# EAGLE board LED STRIP (EAGLE 6.0)
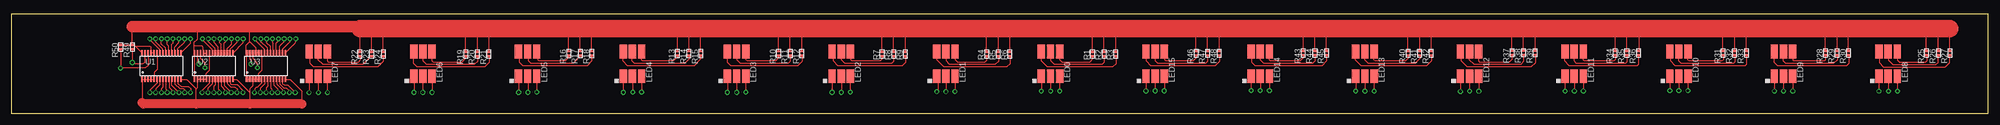
[diagram p0: board, top side]
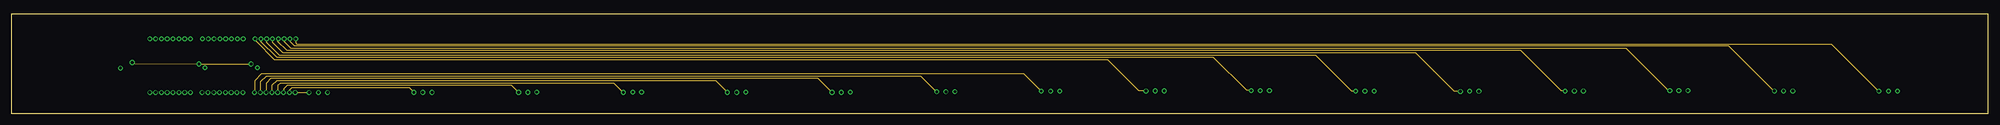
[diagram p1: board, inner layer Inner1]
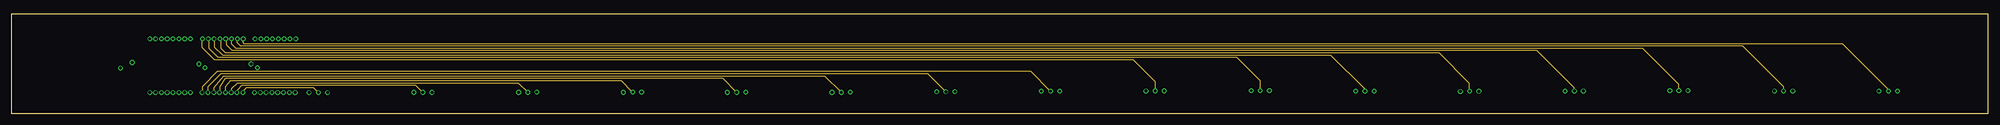
[diagram p2: board, inner layer Inner2]
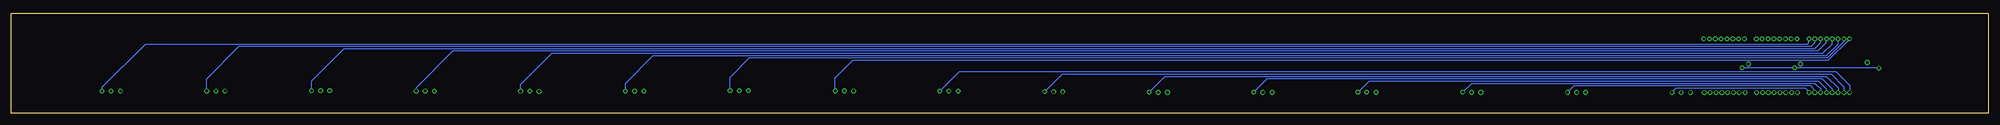
[diagram p3: board, bottom side, seen from below]

Size 431.8 x 21.84 mm. Coordinates in mm from the lower left corner, seen from the top.
Outline: 0,0 431.8,0 431.8,21.84 0,21.84 0,0
Copper layers (1*2+15*16): Top 0.035mm / dielectric 1.5mm / Inner1 0.035mm / dielectric 0.15mm / Inner2 0.035mm / dielectric 0.2mm / Bottom 0.035mm
Design rules: minimum track width 10mil, minimum drill 23mil, track to track 8mil, track to pad 8mil, pad to pad 8mil, via to via 8mil, smd to smd 8mil, copper to edge 40mil, drill to drill 8mil, minimum pad ring 10mil, minimum via ring 8mil, stop-mask expansion 4mil, vias tented up to drill 0mil, thermal gap 10mil

## Footprints (pad centres in the part's own frame; a part is rotated, then mirrored left to right if it is on the bottom)
6-PLCC = smd 3 x 1.6: 1 0,0; 2 0,-2; 3 0,-4; 4 5.4,-4; 5 5.4,-2; 6 5.4,0
0402 = smd 0.4 x 0.6: P$1 0,0; P$2 0.9,0
TSSOP28 = smd 0.35 x 1.2: 1 -4.225,-2.9; 2 -3.575,-2.9; 3 -2.925,-2.9; 4 -2.275,-2.9; 5 -1.625,-2.9; 6 -0.975,-2.9; 7 -0.325,-2.9; 8 0.325,-2.9; 9 0.975,-2.9; 10 1.625,-2.9; 11 2.275,-2.9; 12 2.925,-2.9; 13 3.575,-2.9; 14 4.225,-2.9; 15 4.225,2.9; 16 3.575,2.9; 17 2.925,2.9; 18 2.275,2.9; 19 1.625,2.9; 20 0.975,2.9; 21 0.325,2.9; 22 -0.325,2.9; 23 -0.975,2.9; 24 -1.625,2.9; 25 -2.275,2.9; 26 -2.925,2.9; 27 -3.575,2.9; 28 -4.225,2.9

## Placement (x,y rotation side)
LED0  LED_RGB  [6-PLCC]  224.98,8.13 90 top
LED1  LED_RGB  [6-PLCC]  202.12,8.13 90 top
LED2  LED_RGB  [6-PLCC]  179.26,8.13 90 top
LED3  LED_RGB  [6-PLCC]  156.4,8.13 90 top
LED4  LED_RGB  [6-PLCC]  133.66,8.13 90 top
LED5  LED_RGB  [6-PLCC]  110.74,8.13 90 top
LED6  LED_RGB  [6-PLCC]  87.88,8.13 90 top
LED7  LED_RGB  [6-PLCC]  65.02,8.13 90 top
LED8  LED_RGB  [6-PLCC]  407.98,8.13 90 top
LED9  LED_RGB  [6-PLCC]  385.12,8.13 90 top
LED10  LED_RGB  [6-PLCC]  362.26,8.13 90 top
LED11  LED_RGB  [6-PLCC]  339.4,8.13 90 top
LED12  LED_RGB  [6-PLCC]  316.54,8.13 90 top
LED13  LED_RGB  [6-PLCC]  293.68,8.13 90 top
LED14  LED_RGB  [6-PLCC]  270.82,8.13 90 top
LED15  LED_RGB  [6-PLCC]  247.84,8.13 90 top
R1  [0402]  236.16,13.46 270 top
R2  [0402]  238.7,13.46 270 top
R3  [0402]  241.24,13.46 270 top
R4  [0402]  213.05,13.46 270 top
R5  [0402]  215.59,13.46 270 top
R6  [0402]  218.13,13.46 270 top
R7  [0402]  190.19,13.46 270 top
R8  [0402]  192.73,13.46 270 top
R9  [0402]  195.27,13.46 270 top
R10  [0402]  167.58,13.59 270 top
R11  [0402]  170.12,13.59 270 top
R12  [0402]  172.66,13.59 270 top
R13  [0402]  145.48,13.59 270 top
R14  [0402]  148.02,13.59 270 top
R15  [0402]  150.56,13.59 270 top
R16  [0402]  121.73,13.59 270 top
R17  [0402]  124.27,13.59 270 top
R18  [0402]  126.81,13.59 270 top
R19  [0402]  99.25,13.46 270 top
R20  [0402]  101.79,13.46 270 top
R21  [0402]  104.33,13.46 270 top
R22  [0402]  76.16,13.44 270 top
R23  [0402]  78.7,13.44 270 top
R24  [0402]  81.24,13.44 270 top
R25  [0402]  418.4,13.67 270 top
R26  [0402]  420.94,13.67 270 top
R27  [0402]  423.48,13.67 270 top
R28  [0402]  396.27,13.67 270 top
R29  [0402]  398.81,13.67 270 top
R30  [0402]  401.35,13.67 270 top
R31  [0402]  373.92,13.67 270 top
R32  [0402]  376.46,13.67 270 top
R33  [0402]  379,13.67 270 top
R34  [0402]  350.35,13.67 270 top
R35  [0402]  352.89,13.67 270 top
R36  [0402]  355.43,13.67 270 top
R37  [0402]  327.8,13.74 270 top
R38  [0402]  330.34,13.74 270 top
R39  [0402]  332.88,13.74 270 top
R40  [0402]  305.09,13.64 270 top
R41  [0402]  307.63,13.64 270 top
R42  [0402]  310.17,13.64 270 top
R43  [0402]  282.2,13.67 270 top
R44  [0402]  284.74,13.67 270 top
R45  [0402]  287.28,13.67 270 top
R46  [0402]  258.78,13.64 270 top
R47  [0402]  261.32,13.64 270 top
R48  [0402]  263.86,13.64 270 top
R49  5k  [0402]  26.42,14.99 270 top
R50  5k  [0402]  23.88,14.99 270 top
U1  PCA9635  [TSSOP28]  32.77,10.37 0 top
U2  PCA9635  [TSSOP28]  44.2,10.37 0 top
U3  PCA9635  [TSSOP28]  55.63,10.37 0 top

## Library data of the parts
LED0 LED1-LED15 R1-R50 U1-U3 = lightsuits

## Nets
+5V: R1.P$1 R2.P$1 R3.P$1 R4.P$1 R5.P$1 R6.P$1 R7.P$1 R8.P$1 R9.P$1 R10.P$1 R11.P$1 R12.P$1 R13.P$1 R14.P$1 R15.P$1 R16.P$1 R17.P$1 R18.P$1 R19.P$1 R20.P$1 R21.P$1 R22.P$1 R23.P$1 R24.P$1 R25.P$1 R26.P$1 R27.P$1 R28.P$1 R29.P$1 R30.P$1 R31.P$1 R32.P$1 R33.P$1 R34.P$1 R35.P$1 R36.P$1 R37.P$1 R38.P$1 R39.P$1 R40.P$1 R41.P$1 R42.P$1 R43.P$1 R44.P$1 R45.P$1 R46.P$1 R47.P$1 R48.P$1 R49.P$1 R50.P$1 U1.24 U1.25 U1.28 U2.1 U2.24 U2.25 U2.28 U3.1 U3.2 U3.24 U3.25 U3.28
BLUE0: LED0.1 U3.6
BLUE1: LED1.1 U3.7
BLUE2: LED2.1 U3.8
BLUE3: LED3.1 U3.9
BLUE4: LED4.1 U3.10
BLUE5: LED5.1 U3.11
BLUE6: LED6.1 U3.12
BLUE7: LED7.1 U3.13
BLUE8: LED8.1 U3.15
BLUE9: LED9.1 U3.16
BLUE10: LED10.1 U3.17
BLUE11: LED11.1 U3.18
BLUE12: LED12.1 U3.19
BLUE13: LED13.1 U3.20
BLUE14: LED14.1 U3.21
BLUE15: LED15.1 U3.22
GND: U1.1 U1.2 U1.3 U1.4 U1.5 U1.14 U1.23 U2.2 U2.3 U2.4 U2.5 U2.14 U2.23 U3.3 U3.4 U3.5 U3.14 U3.23
GREEN0: LED0.2 U2.6
GREEN1: LED1.2 U2.7
GREEN2: LED2.2 U2.8
GREEN3: LED3.2 U2.9
GREEN4: LED4.2 U2.10
GREEN5: LED5.2 U2.11
GREEN6: LED6.2 U2.12
GREEN7: LED7.2 U2.13
GREEN8: LED8.2 U2.15
GREEN9: LED9.2 U2.16
GREEN10: LED10.2 U2.17
GREEN11: LED11.2 U2.18
GREEN12: LED12.2 U2.19
GREEN13: LED13.2 U2.20
GREEN14: LED14.2 U2.21
GREEN15: LED15.2 U2.22
N$3: LED15.6 R48.P$2
N$4: LED0.5 R2.P$2
N$5: LED15.4 R46.P$2
N$6: LED14.6 R45.P$2
N$7: LED1.5 R5.P$2
N$8: LED14.4 R43.P$2
N$9: LED13.6 R42.P$2
N$10: LED2.5 R8.P$2
N$11: LED13.4 R40.P$2
N$12: LED12.6 R39.P$2
N$13: LED3.5 R11.P$2
N$14: LED10.4 R31.P$2
N$15: LED9.6 R30.P$2
N$16: LED4.5 R14.P$2
N$17: LED9.4 R28.P$2
N$18: LED8.6 R27.P$2
N$19: LED5.5 R17.P$2
N$20: LED7.6 R24.P$2
N$21: LED8.4 R25.P$2
N$22: LED6.5 R20.P$2
N$23: LED7.4 R22.P$2
N$24: LED6.6 R21.P$2
N$25: LED7.5 R23.P$2
N$26: LED6.4 R19.P$2
N$27: LED5.4 R16.P$2
N$28: LED8.5 R26.P$2
N$29: LED4.6 R15.P$2
N$30: LED4.4 R13.P$2
N$31: LED9.5 R29.P$2
N$32: LED3.6 R12.P$2
N$33: LED3.4 R10.P$2
N$34: LED10.5 R32.P$2
N$35: LED2.6 R9.P$2
N$36: LED1.6 R6.P$2
N$37: LED11.5 R35.P$2
N$38: LED1.4 R4.P$2
N$39: LED0.6 R3.P$2
N$40: LED12.5 R38.P$2
N$41: LED0.4 R1.P$2
N$42: LED2.4 R7.P$2
N$43: LED13.5 R41.P$2
N$44: LED5.6 R18.P$2
N$45: LED10.6 R33.P$2
N$46: LED14.5 R44.P$2
N$47: LED11.4 R34.P$2
N$48: LED11.6 R36.P$2
N$49: LED15.5 R47.P$2
N$50: LED12.4 R37.P$2
RED0: LED0.3 U1.6
RED1: LED1.3 U1.7
RED2: LED2.3 U1.8
RED3: LED3.3 U1.9
RED4: LED4.3 U1.10
RED5: LED5.3 U1.11
RED6: LED6.3 U1.12
RED7: LED7.3 U1.13
RED8: LED8.3 U1.15
RED9: LED9.3 U1.16
RED10: LED10.3 U1.17
RED11: LED11.3 U1.18
RED12: LED12.3 U1.19
RED13: LED13.3 U1.20
RED14: LED14.3 U1.21
RED15: LED15.3 U1.22
SCL: R50.P$2 U1.26 U2.26 U3.26
SDA: R49.P$2 U1.27 U2.27 U3.27

## Tracks (layer width: path | path; a pad name or v marks a point on that pad's centre or on a via)
+5V
  Top 0.254: R22.P$1 76.16,18.5 76.2,18.54 | R23.P$1 78.7,18.5 78.74,18.54 | R24.P$1 81.24,18.25 81.53,18.54 | R19.P$1 99.25,18.48 99.31,18.54 | R20.P$1 101.79,18.35 101.6,18.54 | R21.P$1 104.33,18.35 104.14,18.54 | R16.P$1 121.73,18.47 121.67,18.54 | R17.P$1 124.27,18.47 124.21,18.54 | R18.P$1 126.81,13.65 126.75,13.72 126.75,18.29 127,18.54 | R13.P$1 145.48,19.62 145.29,19.81 145.29,19.05 145.8,18.54 | R14.P$1 148.02,18.35 147.83,18.54 | R15.P$1 150.56,18.48 150.62,18.54 | R10.P$1 167.58,18.48 167.64,18.54 | R11.P$1 170.12,18.23 170.43,18.54 | R12.P$1 172.66,18.35 172.47,18.54 | R7.P$1 190.19,18.09 189.74,18.54 | R8.P$1 192.73,18.35 192.53,18.54 | R9.P$1 195.27,18.35 195.07,18.54 | R4.P$1 213.05,18.35 212.85,18.54 | R5.P$1 215.59,18.48 215.65,18.54 | R6.P$1 218.13,18.35 217.93,18.54 | R1.P$1 236.16,18.48 236.22,18.54 | R2.P$1 238.7,18.35 238.51,18.54 | R3.P$1 241.24,18.48 241.3,18.54 | R46.P$1 258.78,18.5 258.83,18.54 | R47.P$1 261.32,18.33 261.11,18.54 | R48.P$1 263.86,18.25 264.16,18.54 | R43.P$1 282.2,19.04 281.94,19.3 281.94,19.05 282.45,18.54 | R44.P$1 284.74,18.3 284.99,18.54 | R45.P$1 287.28,18.53 287.27,18.54 | R40.P$1 305.09,18 304.55,18.54 | R41.P$1 307.63,17.75 306.83,18.54 | R42.P$1 310.17,18.25 309.88,18.54 | R37.P$1 327.8,18.15 327.41,18.54 | R38.P$1 330.34,18.41 330.2,18.54 | R39.P$1 332.88,18.15 332.49,18.54 | R34.P$1 350.35,18.2 350.01,18.54 | R35.P$1 352.89,18.2 352.55,18.54 | R36.P$1 355.55,13.67 355.6,13.72 355.6,18.03 355.09,18.54 | R31.P$1 373.92,13.68 373.89,13.72 373.89,18.29 374.14,18.54 | R32.P$1 376.46,18.25 376.17,18.54 | R33.P$1 379,13.68 378.97,13.72 378.97,18.54 | R28.P$1 396.27,13.68 396.24,13.72 396.24,18.29 395.99,18.54
  Top 0.254: R29.P$1 398.81,18 398.27,18.54 | R30.P$1 401.36,13.68 401.32,13.72 401.32,18.54 | R25.P$1 418.39,13.67 418.34,13.72 418.34,18.29 418.08,18.54 | R26.P$1 420.94,18.23 420.62,18.54 | R27.P$1 423.47,13.67 423.42,13.72 423.42,18.29 423.16,18.54 | 52.2,15.62 52.07,15.75 52.07,19.05 | 52.2,15.62 53.34,14.48 53.34,13.28 U3.25 U3.24 | R50.P$1 R49.P$1 | R49.P$1 26.42,19.05 | R49.P$1 26.82,14.99 27.13,14.68 | 27.13,14.68 U1.28 | 39.97,14.73 U2.28 U2.1 | 39.97,14.73 39.97,15.59 40.64,16.26 40.64,18.8 40.89,19.05 | U3.2 U3.1 U3.28 51.31,13.36 51.31,14.99 51.94,15.62 52.2,15.62 | U1.24 U1.25 30.5,13.28 30.5,14.53 30.35,14.68 27.13,14.68 | U2.24 U2.25 41.91,13.28 41.91,14.48 41.66,14.73 39.97,14.73
  Top 2.54: 26.42,19.05 40.89,19.05 52.07,19.05 76.2,19.05 | 76.2,19.05 76.96,18.29 | 76.2,19.05 76.2,18.54
  Top 3.81: 76.2,18.54 78.74,18.54 81.53,18.54 99.31,18.54 101.6,18.54 104.14,18.54 121.67,18.54 124.21,18.54 127,18.54 145.8,18.54 147.83,18.54 150.62,18.54 167.64,18.54 170.43,18.54 172.47,18.54 189.74,18.54 192.53,18.54 195.07,18.54 212.85,18.54 215.65,18.54 217.93,18.54 236.22,18.54 238.51,18.54 241.3,18.54 258.83,18.54 261.11,18.54 264.16,18.54 282.45,18.54 284.99,18.54 287.27,18.54 304.55,18.54 306.83,18.54 309.88,18.54 327.41,18.54 330.2,18.54 332.49,18.54 350.01,18.54 352.55,18.54 355.09,18.54 374.14,18.54 376.17,18.54 378.97,18.54 395.99,18.54 398.27,18.54 401.32,18.54 418.08,18.54 420.62,18.54 423.16,18.54 423.42,18.54
BLUE0  (via drill 0.6)
  Top 0.254: U3.6 54.65,6.64 53.72,5.71 53.47,5.71 53.09,5.33 v53.09,4.57 | LED0.1 v224.98,4.85
  Inner1 0.254: v224.98,4.85 221.19,8.64 54.61,8.64 53.09,7.11 v53.09,4.57
BLUE1  (via drill 0.6)
  Top 0.254: U3.7 55.3,6.41 54.36,5.46 v54.36,4.57 | LED1.1 202.39,7.85 202.39,4.99 v202.12,4.72
  Inner1 0.254: v54.36,4.57 54.36,6.86 55.63,8.13 198.7,8.13 202.11,4.72 v202.12,4.72
BLUE2  (via drill 0.6)
  Top 0.254: U3.8 55.95,5.91 55.63,5.59 v55.63,4.57 | LED2.1 v179.26,4.6
  Inner1 0.254: v55.63,4.57 55.63,6.6 56.64,7.62 176.23,7.62 v179.26,4.6
BLUE3  (via drill 0.6)
  Top 0.254: U3.9 56.6,5.63 56.9,5.33 v56.9,4.57 | LED3.1 v156.4,4.6
  Inner1 0.254: v156.4,4.6 153.88,7.11 57.91,7.11 56.9,6.1 v56.9,4.57
BLUE4  (via drill 0.6)
  Top 0.254: U3.10 57.25,6.25 58.17,5.33 v58.17,4.57 | LED4.1 v133.66,4.6
  Inner1 0.254: v133.66,4.6 131.66,6.6 58.67,6.6 58.17,6.1 v58.17,4.57
BLUE5  (via drill 0.6)
  Top 0.254: U3.11 57.9,6.41 59.44,4.88 v59.44,4.57 | LED5.1 110.8,8.07 v110.8,4.6
  Inner1 0.254: v110.8,4.6 109.31,6.1 60.2,6.1 59.44,5.33 v59.44,4.57
BLUE6  (via drill 0.6)
  Top 0.254: U3.12 58.55,6.5 59.44,5.61 60.07,5.61 60.71,5.08 v60.71,4.57 | LED6.1 87.94,8.07 v87.94,4.6
  Inner1 0.254: v87.94,4.6 86.95,5.59 61.21,5.59 60.71,5.08 v60.71,4.57
BLUE7  (via drill 0.6)
  Top 0.254: U3.13 59.18,6.6 59.56,6.22 60.33,6.22 v61.98,4.57 | LED7.1 v65.02,4.57
  Inner1 0.254: v61.98,4.57 v65.02,4.57
BLUE8  (via drill 0.6)
  Top 0.254: U3.15 62.12,15.53 v62.12,16.32 | 407.94,8.08 LED8.1 407.98,4.89 v407.94,4.85
  Inner1 0.254: v62.12,16.32 62.1,16.31 62.1,15.47 62.36,15.21 397.56,15.21 407.92,4.85 v407.94,4.85
BLUE9  (via drill 0.6)
  Top 0.254: U3.16 59.21,14.07 60.85,15.71 v60.85,16.32 | LED9.1 v385.12,4.91 v385.13,4.9
  Inner1 0.254: v385.13,4.9 384.99,4.9 375.16,14.73 61.82,14.73 60.85,15.71 v60.85,16.32
BLUE10  (via drill 0.6)
  Top 0.254: U3.17 58.57,13.29 58.57,14.73 59.58,15.74 v59.58,16.32 | LED10.1 v362.26,4.96 v362.27,4.95
  Inner1 0.254: v362.27,4.95 362.08,4.95 352.81,14.22 61.09,14.22 59.58,15.74 v59.58,16.32
BLUE11  (via drill 0.6)
  Top 0.254: U3.18 57.89,13.28 57.89,15.39 58.31,15.81 v58.31,16.32 | LED11.1 v339.4,4.88 v339.41,4.88
  Inner1 0.254: v339.41,4.88 338.53,4.88 329.69,13.72 60.2,13.72 58.2,15.71 58.2,16.22 v58.31,16.32
BLUE12  (via drill 0.6)
  Top 0.254: U3.19 57.23,13.29 57.23,15.37 57.04,15.56 v57.04,16.32 | LED12.1 316.54,4.82 v316.53,4.8
  Inner1 0.254: v316.53,4.8 315.24,4.8 306.83,13.21 59.38,13.21 57.11,15.48 57.11,16.25 v57.04,16.32
BLUE13  (via drill 0.6)
  Top 0.254: U3.20 56.59,13.28 56.59,14.61 55.77,15.43 v55.77,16.32 | LED13.1 293.68,4.87 v293.67,4.85
  Inner1 0.254: v293.67,4.85 292.84,4.85 284.99,12.7 58.56,12.7 55.77,15.49 v55.77,16.32
BLUE14  (via drill 0.6)
  Top 0.254: U3.21 55.96,14.33 54.5,15.79 v54.5,16.32 | LED14.1 270.82,5 v270.81,4.98
  Inner1 0.254: v270.81,4.98 269.85,4.98 262.64,12.19 58.09,12.19 54.5,15.79 v54.5,16.32
BLUE15  (via drill 0.6)
  Top 0.254: U3.22 55.3,13.95 53.23,16.01 v53.23,16.32 | LED15.1 v247.84,4.9
  Inner1 0.254: v247.84,4.9 246.3,4.9 239.52,11.68 57.56,11.68 53.42,15.82 53.42,16.13 v53.23,16.32
GND
  Top 0.254: 40.39,5.33 40.62,5.57 U2.2 U2.3 U2.4 U2.5 42.57,8.79 43.22,9.44 U2.23 | 28.45,2.29 28.54,2.38 U1.1 U1.2 U1.3 U1.4 U1.5 31.14,8.92 31.79,9.57 U1.23 | U1.14 38.25,7.47 40.39,5.33 | U3.14 60.86,7.47 63.5,4.83 63.5,2.03 | U3.23 54.65,9.44 54,8.79 U3.5 U3.4 U3.3 52.7,5.96 52.07,5.33 52.07,4.57 | 40.39,2.03 40.39,5.33 | U2.14 49.17,7.47 52.07,4.57 | 52.07,4.57 52.07,2.03
  Top 1.93: 63.5,2.03 52.07,2.03 40.39,2.03 28.89,2.03 28.54,2.38
GREEN0  (via drill 0.6)
  Top 0.254: U2.6 43.2,7.45 43.2,6.55 41.66,5 v41.66,4.57 | LED0.2 227.01,8.1 v227.01,4.85
  Inner2 0.254: v227.01,4.85 222.72,9.14 44.96,9.14 41.66,5.84 v41.66,4.57
GREEN1  (via drill 0.6)
  Top 0.254: U2.7 43.87,6.4 42.93,5.46 v42.93,4.57 | LED1.2 204.15,8.1 v204.15,4.72
  Inner2 0.254: v204.15,4.72 200.24,8.64 45.72,8.64 42.93,5.84 v42.93,4.57
GREEN2  (via drill 0.6)
  Top 0.254: U2.8 44.53,6.22 44.2,5.89 v44.2,4.57 | LED2.2 181.29,8.1 v181.29,4.6
  Inner2 0.254: v181.29,4.6 177.76,8.13 46.23,8.13 44.2,5.59 v44.2,4.57
GREEN3  (via drill 0.6)
  Top 0.254: U2.9 45.19,7.45 45.19,5.33 45.47,5.05 v45.47,4.57 | LED3.2 158.43,8.1 v158.43,4.6
  Inner2 0.254: v158.43,4.6 155.41,7.62 46.74,7.62 45.47,5.84 v45.47,4.57
GREEN4  (via drill 0.6)
  Top 0.254: U2.10 45.82,5.97 46.74,5.05 v46.74,4.57 | LED4.2 135.74,8.05 v135.74,4.63
  Inner2 0.254: v135.74,4.63 133.26,7.11 47.75,7.11 46.74,5.84 v46.74,4.57
GREEN5  (via drill 0.6)
  Top 0.254: U2.11 46.48,7.46 46.48,6.15 48.01,4.62 v48.01,4.57 | LED5.2 112.84,8.04 v112.84,4.6
  Inner2 0.254: v112.84,4.6 110.83,6.6 49.28,6.6 48.01,5.33 v48.01,4.57
GREEN6  (via drill 0.6)
  Top 0.254: U2.12 47.14,7.45 47.14,6.53 47.85,5.82 48.82,5.82 49.28,5.36 v49.28,4.57 | LED6.2 89.85,8.09 v89.85,4.6
  Inner2 0.254: v89.85,4.6 88.35,6.1 50.29,6.1 49.28,5.08 v49.28,4.57
GREEN7  (via drill 0.6)
  Top 0.254: LED7.2 67.02,4.6 v67.06,4.57 | U2.13 47.8,7.44 47.8,6.55 48.01,6.35 49.28,6.35 50.55,5.08 v50.55,4.57
  Inner2 0.254: v67.06,4.57 66.04,5.59 51.31,5.59 50.55,4.83 v50.55,4.57
GREEN8  (via drill 0.6)
  Top 0.254: U2.15 50.62,15.46 v50.62,16.32 | LED8.2 409.98,4.92 v410.05,4.85
  Inner2 0.254: v410.05,4.85 410.05,5.24 400.05,15.21 50.88,15.21 50.62,15.49 50.62,15.5 v50.62,16.32
GREEN9  (via drill 0.6)
  Top 0.254: U2.16 47.78,14.1 49.35,15.67 v49.35,16.32 | LED9.2 387.12,4.92 v387.14,4.9
  Inner2 0.254: v387.14,4.9 387.14,5.8 378.21,14.73 50.04,14.73 49.28,15.49 49.28,16.23 | 49.28,16.23 49.35,16.31 | v49.35,16.32 49.28,16.25 49.28,16.23
GREEN10  (via drill 0.6)
  Top 0.254: U2.17 47.12,14.25 48.08,15.21 v48.08,16.32 | LED10.2 364.26,4.99 v364.25,4.98
  Inner2 0.254: v364.25,4.98 364.25,6.33 356.36,14.22 49.06,14.22 48.08,15.21 v48.08,16.32
GREEN11  (via drill 0.6)
  Top 0.254: U2.18 46.48,13.28 46.48,15.44 46.81,15.77 v46.81,16.32 | LED11.2 341.4,4.92 v341.42,4.9
  Inner2 0.254: v341.42,4.9 341.42,5.55 333.25,13.72 48.26,13.72 46.99,14.99 46.99,16.14 v46.81,16.32
GREEN12  (via drill 0.6)
  Top 0.254: U2.19 45.82,15.16 45.54,15.45 v45.54,16.32 | LED12.2 318.54,4.89 v318.53,4.88
  Inner2 0.254: v318.53,4.88 318.53,6.59 311.91,13.21 46.84,13.21 45.82,14.22 45.82,16.04 v45.54,16.32
GREEN13  (via drill 0.6)
  Top 0.254: U2.20 45.19,13.28 45.19,14.55 44.27,15.47 v44.27,16.32 | LED13.2 295.68,4.86 v295.67,4.85
  Inner2 0.254: v295.67,4.85 295.67,5.32 288.29,12.7 46.23,12.7 44.45,14.48 44.45,16.14 v44.27,16.32
GREEN14  (via drill 0.6)
  Top 0.254: U2.21 44.53,14.25 43,15.78 v43,16.32 | LED14.2 272.82,4.99 v272.81,4.98
  Inner2 0.254: v272.81,4.98 272.81,7.1 267.72,12.19 45.21,12.19 43.18,14.22 43.18,16.14 v43,16.32
GREEN15  (via drill 0.6)
  Top 0.254: U2.22 43.87,14 41.73,16.13 v41.73,16.32 | LED15.2 249.84,4.96 v249.88,4.93
  Inner2 0.254: v249.88,4.93 249.88,6.92 245.11,11.68 44.45,11.68 41.66,14.48 41.66,16.25 v41.73,16.32
N$3
  Top 0.254: R48.P$2 263.86,11.39 262.89,10.41 248.92,10.41 247.9,11.43 247.9,13.47 LED15.6
N$4
  Top 0.254: R2.P$2 238.7,11.12 238.25,10.67 227.84,10.67 227.08,11.43 227.08,13.44 LED0.5
N$5
  Top 0.254: R46.P$2 258.78,12.15 258.06,11.43 252.22,11.43 251.97,11.68 251.97,13.4 LED15.4
N$6
  Top 0.254: R45.P$2 287.28,11.44 286.26,10.41 271.78,10.41 271.02,11.18 271.02,13.33 LED14.6
N$7
  Top 0.254: R5.P$2 215.59,11.37 214.88,10.67 204.98,10.67 204.22,11.43 204.22,13.44 LED1.5
N$8
  Top 0.254: R43.P$2 282.2,12.2 281.43,11.43 275.08,11.43 274.83,11.68 LED14.4
N$9
  Top 0.254: R42.P$2 310.17,11.46 309.12,10.41 294.89,10.41 293.62,11.68 293.62,13.47 LED13.6
N$10
  Top 0.254: R8.P$2 192.73,11.37 192.28,10.92 182.12,10.92 181.36,11.68 181.36,13.44 LED2.5
N$11
  Top 0.254: R40.P$2 305.09,11.97 304.55,11.43 297.94,11.43 297.69,11.68 LED13.4
N$12
  Top 0.254: R39.P$2 332.88,11.06 331.98,10.16 318.01,10.16 316.74,11.43 316.74,13.33 LED12.6
N$13
  Top 0.254: R11.P$2 170.12,11.37 169.67,10.92 159.26,10.92 158.5,11.68 158.5,13.44 LED3.5
N$14
  Top 0.254: R31.P$2 373.92,11.72 373.63,11.43 366.52,11.43 366.27,11.68 LED10.4
N$15
  Top 0.254: R30.P$2 401.36,10.96 400.81,10.41 385.83,10.41 385.06,11.18 385.06,13.47 LED9.6
N$16
  Top 0.254: R14.P$2 148.02,11.88 147.07,10.92 136.14,10.92 135.64,11.43 135.64,13.5 LED4.5
N$17
  Top 0.254: R28.P$2 396.27,11.72 395.99,11.43 389.38,11.43 389.12,11.69 LED9.4
N$18
  Top 0.254: LED8.6 407.98,11.12 408.94,10.16 422.4,10.16 423.42,11.18 423.42,12.71 R27.P$2
N$19
  Top 0.254: R17.P$2 124.27,12.51 122.68,10.92 113.54,10.92 113.03,11.43 113.03,13.24 LED5.5
N$20
  Top 0.254: 64.98,13.57 LED7.6 65.28,13.27 65.28,10.92 66.04,10.16 80.01,10.16 81.24,11.39 R24.P$2
N$21
  Top 0.254: R25.P$2 418.4,11.49 418.08,11.18 412.5,11.18 411.98,11.69 LED8.4
N$22
  Top 0.254: R20.P$2 101.79,11.37 101.09,10.67 90.68,10.67 89.92,11.43 89.92,13.5 LED6.5
N$23
  Top 0.254: 69.09,13.59 LED7.4 69.09,13.46 69.09,11.43 69.34,11.18 75.69,11.18 76.16,11.64 R22.P$2
N$24
  Top 0.254: R21.P$2 104.33,11.12 103.38,10.16 88.65,10.16 87.88,10.92 LED6.6
N$25
  Top 0.254: 67.06,13.56 LED7.5 67.06,13.5 67.06,11.68 68.07,10.67 76.71,10.67 78.58,12.54 R23.P$2
N$26
  Top 0.254: R19.P$2 99.25,12.13 98.3,11.18 92.2,11.18 91.95,11.43 91.95,13.46 LED6.4
N$27
  Top 0.254: R16.P$2 121.73,12.26 120.9,11.43 115.32,11.43 115.06,11.68 115.06,13.21 LED5.4
N$28
  Top 0.254: LED8.5 409.98,11.66 410.97,10.67 420.37,10.67 420.88,11.18 420.88,12.71 R26.P$2
N$29
  Top 0.254: R15.P$2 150.56,11.88 149.1,10.41 134.62,10.41 133.6,11.43 133.6,13.47 LED4.6
N$30
  Top 0.254: R13.P$2 145.48,12.39 144.53,11.43 137.92,11.43 137.67,11.68 LED4.4
N$31
  Top 0.254: R29.P$2 398.81,11.72 398.02,10.92 387.6,10.92 387.1,11.43 387.1,13.5 LED9.5
N$32
  Top 0.254: R12.P$2 172.66,11.37 171.7,10.41 157.23,10.41 156.46,11.18 156.46,13.47 LED3.6
N$33
  Top 0.254: R10.P$2 167.58,12.13 166.88,11.43 160.78,11.43 160.53,11.68 160.53,13.4 LED3.4
N$34
  Top 0.254: R32.P$2 376.46,11.21 376.17,10.92 364.74,10.92 364.24,11.43 364.24,13.5 LED10.5
N$35
  Top 0.254: R9.P$2 195.27,11.12 194.56,10.41 180.59,10.41 179.58,11.43 179.58,13.21 LED2.6
N$36
  Top 0.254: R6.P$2 218.13,10.86 217.42,10.16 203.71,10.16 202.18,11.68 202.18,13.47 LED1.6
N$37
  Top 0.254: R35.P$2 352.89,11.26 352.55,10.92 341.88,10.92 341.38,11.43 341.38,13.5 LED11.5
N$38
  Top 0.254: R4.P$2 213.05,11.62 212.6,11.18 206.76,11.18 206.25,11.68 206.25,13.4 LED1.4
N$39
  Top 0.254: R3.P$2 241.24,10.86 240.54,10.16 226.31,10.16 225.04,11.43 225.04,13.47 LED0.6
N$40
  Top 0.254: R38.P$2 330.34,11.31 329.69,10.67 319.53,10.67 318.52,11.68 318.52,13.5 LED12.5
N$41
  Top 0.254: R1.P$2 236.16,11.88 235.46,11.18 229.62,11.18 229.11,11.68 229.11,13.4 LED0.4
N$42
  Top 0.254: R7.P$2 190.19,11.88 189.74,11.43 183.64,11.43 183.39,11.68 183.39,13.4 LED2.4
N$43
  Top 0.254: R41.P$2 307.63,11.97 306.58,10.92 296.42,10.92 295.66,11.68 295.66,13.5 LED13.5
N$44
  Top 0.254: R18.P$2 126.76,12.69 126.75,12.7 126.75,11.43 125.73,10.41 111.76,10.41 111,11.18 111,13.27 LED5.6
N$45
  Top 0.254: R33.P$2 379,10.7 378.71,10.41 363.47,10.41 362.46,11.43 362.46,13.33 LED10.6
N$46
  Top 0.254: R44.P$2 284.74,11.44 284.23,10.92 273.56,10.92 272.8,11.68 272.8,13.5 LED14.5
N$47
  Top 0.254: R34.P$2 350.35,11.77 350.01,11.43 343.66,11.43 343.41,11.68 LED11.4
N$48
  Top 0.254: R36.P$2 355.43,10.75 355.09,10.41 340.36,10.41 339.34,11.43 339.34,13.47 LED11.6
N$49
  Top 0.254: R47.P$2 261.32,11.39 260.86,10.92 250.44,10.92 249.94,11.43 249.94,13.44 LED15.5
N$50
  Top 0.254: R37.P$2 327.8,11.82 327.15,11.18 320.8,11.18 320.55,11.43 LED12.4
RED0  (via drill 0.6)
  Top 0.254: U1.6 31.8,6.63 30.23,5.05 v30.23,4.57 | LED0.3 v228.99,4.88
  Bottom 0.254: v228.99,4.88 224.72,9.14 33.27,9.14 30.23,6.1 v30.23,4.57
RED1  (via drill 0.6)
  Top 0.254: U1.7 32.44,6.25 31.5,5.31 v31.5,4.57 | LED1.3 206.1,8.11 v206.1,4.75
  Bottom 0.254: v206.1,4.75 202.22,8.64 34.29,8.64 31.5,5.84 v31.5,4.57
RED2  (via drill 0.6)
  Top 0.254: U1.8 33.1,5.64 32.77,5.31 v32.77,4.57 | LED2.3 183.25,8.11 v183.25,4.67
  Bottom 0.254: v183.25,4.67 179.79,8.13 35.31,8.13 32.77,5.59 v32.77,4.57
RED3  (via drill 0.6)
  Top 0.254: U1.9 33.73,5.33 34.04,5.03 v34.04,4.57 | LED3.3 v160.41,4.67
  Bottom 0.254: v160.41,4.67 157.46,7.62 36.32,7.62 34.04,5.33 v34.04,4.57
RED4  (via drill 0.6)
  Top 0.254: U1.10 34.42,7.44 34.42,5.66 35.31,4.78 v35.31,4.57 | LED4.3 v137.65,4.65
  Bottom 0.254: v137.65,4.65 135.19,7.11 37.08,7.11 35.31,5.33 v35.31,4.57
RED5  (via drill 0.6)
  Top 0.254: v36.58,4.57 35.04,6.11 U1.11 | LED5.3 v114.74,4.67
  Bottom 0.254: v114.74,4.67 112.81,6.6 37.85,6.6 36.58,5.33 v36.58,4.57
RED6  (via drill 0.6)
  Top 0.254: U1.12 35.69,6.45 36.7,5.44 37.57,5.44 37.85,5.16 v37.85,4.57 | LED6.3 v91.88,4.6
  Bottom 0.254: v91.88,4.6 90.38,6.1 38.86,6.1 37.85,5.08 v37.85,4.57
RED7  (via drill 0.6)
  Top 0.254: v69.06,4.57 69.06,8.09 LED7.3 | U1.13 36.37,7.44 36.37,6.6 37.03,5.94 38.61,5.94 39.12,5.44 v39.12,4.57
  Bottom 0.254: v69.06,4.57 68.05,5.59 39.88,5.59 39.12,4.83 v39.12,4.57
RED8  (via drill 0.6)
  Top 0.254: U1.15 39.12,15.39 v39.12,16.32 | LED8.3 411.98,4.87 v412,4.85
  Bottom 0.254: v412,4.85 412,5.83 402.49,15.21 39.4,15.21 39.12,15.49 v39.12,16.32
RED9  (via drill 0.6)
  Top 0.254: U1.16 36.37,13.3 36.37,14.17 37.85,15.65 v37.85,16.32 | LED9.3 389.12,4.93 v389.15,4.9
  Bottom 0.254: v389.15,4.9 389.15,7.6 382.02,14.73 38.61,14.73 37.77,15.57 37.77,16.25 v37.85,16.32
RED10  (via drill 0.6)
  Top 0.254: U1.17 35.69,14.58 36.58,15.47 v36.58,16.32 | LED10.3 366.26,5.01 v366.23,4.98
  Bottom 0.254: v366.23,4.98 366.23,7.15 359.16,14.22 37.82,14.22 36.58,15.47 v36.58,16.32
RED11  (via drill 0.6)
  Top 0.254: U1.18 35.05,13.28 35.05,15.16 35.31,15.42 v35.31,16.32 | LED11.3 v343.4,4.91 v343.4,4.9
  Bottom 0.254: v343.4,4.9 343.4,5.6 335.28,13.72 37.08,13.72 35.31,15.49 v35.31,16.32
RED12  (via drill 0.6)
  Top 0.254: U1.19 34.39,14.73 34.04,15.09 v34.04,16.32 | LED12.3 320.54,4.85 v320.56,4.83
  Bottom 0.254: v320.56,4.83 320.56,6.33 313.69,13.21 36.07,13.21 34.04,15.24 v34.04,16.32
RED13  (via drill 0.6)
  Top 0.254: U1.20 33.73,13.28 33.73,14.28 32.77,15.24 v32.77,16.32 | LED13.3 v297.68,4.88
  Bottom 0.254: v297.68,4.88 297.68,6.61 291.59,12.7 35.31,12.7 32.77,15.24 v32.77,16.32
RED14  (via drill 0.6)
  Top 0.254: U1.21 33.07,13.29 33.07,14.07 31.5,15.65 v31.5,16.32 | LED14.3 v274.82,4.98
  Bottom 0.254: v274.82,4.98 274.82,7.88 270.51,12.19 35.05,12.19 31.5,15.75 v31.5,16.32
RED15  (via drill 0.6)
  Top 0.254: U1.22 32.44,13.97 30.23,16.18 v30.23,16.32 | LED15.3 251.84,4.94 v251.83,4.93
  Bottom 0.254: v251.83,4.93 251.83,7.76 247.9,11.68 34.86,11.68 v30.23,16.32
SCL  (via drill 0.6)
  Top 0.254: U2.26 41.27,12.09 42.16,11.2 42.16,11.18 42.19,11.15 v42.27,9.98 | U3.26 52.68,13.25 52.68,12.12 53.59,11.2 53.59,10.92 53.72,10.79 v53.72,9.98 | R50.P$2 23.82,14.04 v23.82,9.93 29.26,9.93 29.84,10.52 U1.26
  Bottom 0.254: v53.72,9.98 v42.27,9.98 23.88,9.98 v23.82,9.93
SDA  (via drill 0.6)
  Top 0.254: U2.27 40.62,11.18 v40.95,10.82 | U3.27 52.07,13.25 52.07,11.94 52.35,11.66 v52.35,10.82 | R49.P$2 26.39,14.06 v26.39,11.15 26.64,10.9 28.78,10.9 29.19,11.31 U1.27
  Inner1 0.254: v52.35,10.82 v40.95,10.82 26.64,10.9 v26.39,11.15